# EAGLE board Kendini Dengeleyen Robot (EAGLE 9.7.0)

Size 140.41 x 100.87 mm. Coordinates in mm from the lower left corner, seen from the top.
Outline: 0,0 140.41,0 140.41,100.88 0,100.88 0,0
Copper layers (1*16): Top 0.035mm / dielectric 1.5mm / Bottom 0.035mm
Design rules "default": minimum track width 6mil, minimum drill 0.35mm, track to track 6mil, track to pad 6mil, pad to pad 6mil, via to via 6mil, smd to smd 6mil, copper to edge 40mil, drill to drill 6mil, minimum pad ring 10mil, minimum via ring 8mil, stop-mask expansion 4mil, vias tented up to drill 0mil, thermal gap 10mil

## Footprints (pad centres in the part's own frame; a part is rotated, then mirrored left to right if it is on the bottom)
MOTOR = drill 1.118 pad 3.15 octagon: + 2.54,0; - -2.54,0
DIP762W53P254L1969H508Q16B = drill 0.743 pad 1.343: 1 -3.81,8.89; 2 -3.81,6.35; 3 -3.81,3.81; 4 -3.81,1.27; 5 -3.81,-1.27; 6 -3.81,-3.81; 7 -3.81,-6.35; 8 -3.81,-8.89; 9 3.81,-8.89; 10 3.81,-6.35; 11 3.81,-3.81; 12 3.81,-1.27; 13 3.81,1.27; 14 3.81,3.81; 15 3.81,6.35; 16 3.81,8.89
ARDUINO-UNO-R3-SHIELD = drill 1.016 pad 1.88: 3.3V 24.13,-2.54; 5V 24.13,0; A0 24.13,12.7; A1 24.13,15.24; A2 24.13,17.78; A3 24.13,20.32; A4 24.13,22.86; A5 24.13,25.4; AREF -24.13,-13.97; D2 -24.13,20.32; D3 -24.13,17.78; D4 -24.13,15.24; D5 -24.13,12.7; D6 -24.13,10.16; D7 -24.13,7.62; D8 -24.13,3.81; D9 -24.13,1.27; D10 -24.13,-1.27; D11 -24.13,-3.81; D12 -24.13,-6.35; D13 -24.13,-8.89; GND@0 24.13,2.54; GND@1 24.13,5.08; GND@2 -24.13,-11.43; IOREF 24.13,-7.62; NC 24.13,-10.16; RES 24.13,-5.08; RX -24.13,25.4; SCL -24.13,-19.05; SDA -24.13,-16.51; TX -24.13,22.86; VIN 24.13,7.62
1X09 = drill 1.016 long: 1 -10.16,0; 2 -7.62,0; 3 -5.08,0; 4 -2.54,0; 5 0,0; 6 2.54,0; 7 5.08,0; 8 7.62,0; 9 10.16,0

## Placement (x,y rotation side)
M1  MOTOR_HDR  [MOTOR]  131.16,34.14 270 top
M2  MOTOR_HDR  [MOTOR]  132.16,8.26 270 top
U1  L293E  [DIP762W53P254L1969H508Q16B]  69.47,17.53 90 top
U2  ARDUINO-UNO-R3-SHIELD  [ARDUINO-UNO-R3-SHIELD]  60.46,71.03 270 top
U3  PINHD-1X09_1X09M  [1X09]  6.35,34.23 270 top

## Library data of the parts
M1 M2 U1-U3 = Tinkercad

## Nets
M1_+: M1.+ U1.11
M1_-: M1.- U1.14
M2_+: M2.+ U1.3
M2_-: M2.- U1.6
U2_5V: U1.16 U2.5V U3.9
U2_D5: U1.1 U2.D5
U2_D6: U1.2 U2.D6
U2_D7: U1.7 U2.D7
U2_D8: U1.9 U2.D8
U2_D9: U1.10 U2.D9
U2_D10: U1.15 U2.D10
U2_GND: U1.4 U1.5 U1.12 U1.13 U2.GND@0 U2.GND@1 U2.GND@2 U3.5 U3.8
U3_1: U2.D2 U3.1
U3_6: U2.A4 U3.6
U3_7: U2.A5 U3.7

## Tracks (layer width: path | path; a pad name or v marks a point on that pad's centre or on a via)
M1_+  (1 unrouted)
M1_-  (1 unrouted)
M2_+  (1 unrouted)
M2_-  (1 unrouted)
U2_5V  (2 unrouted)
U2_D5  (1 unrouted)
U2_D6  (1 unrouted)
U2_D7  (1 unrouted)
U2_D8  (1 unrouted)
U2_D9  (1 unrouted)
U2_D10  (1 unrouted)
U2_GND  (8 unrouted)
U3_1  (1 unrouted)
U3_6  (1 unrouted)
U3_7  (1 unrouted)